# EAGLE board 11_16_22 Inverter PCB (EAGLE 7.7.0)
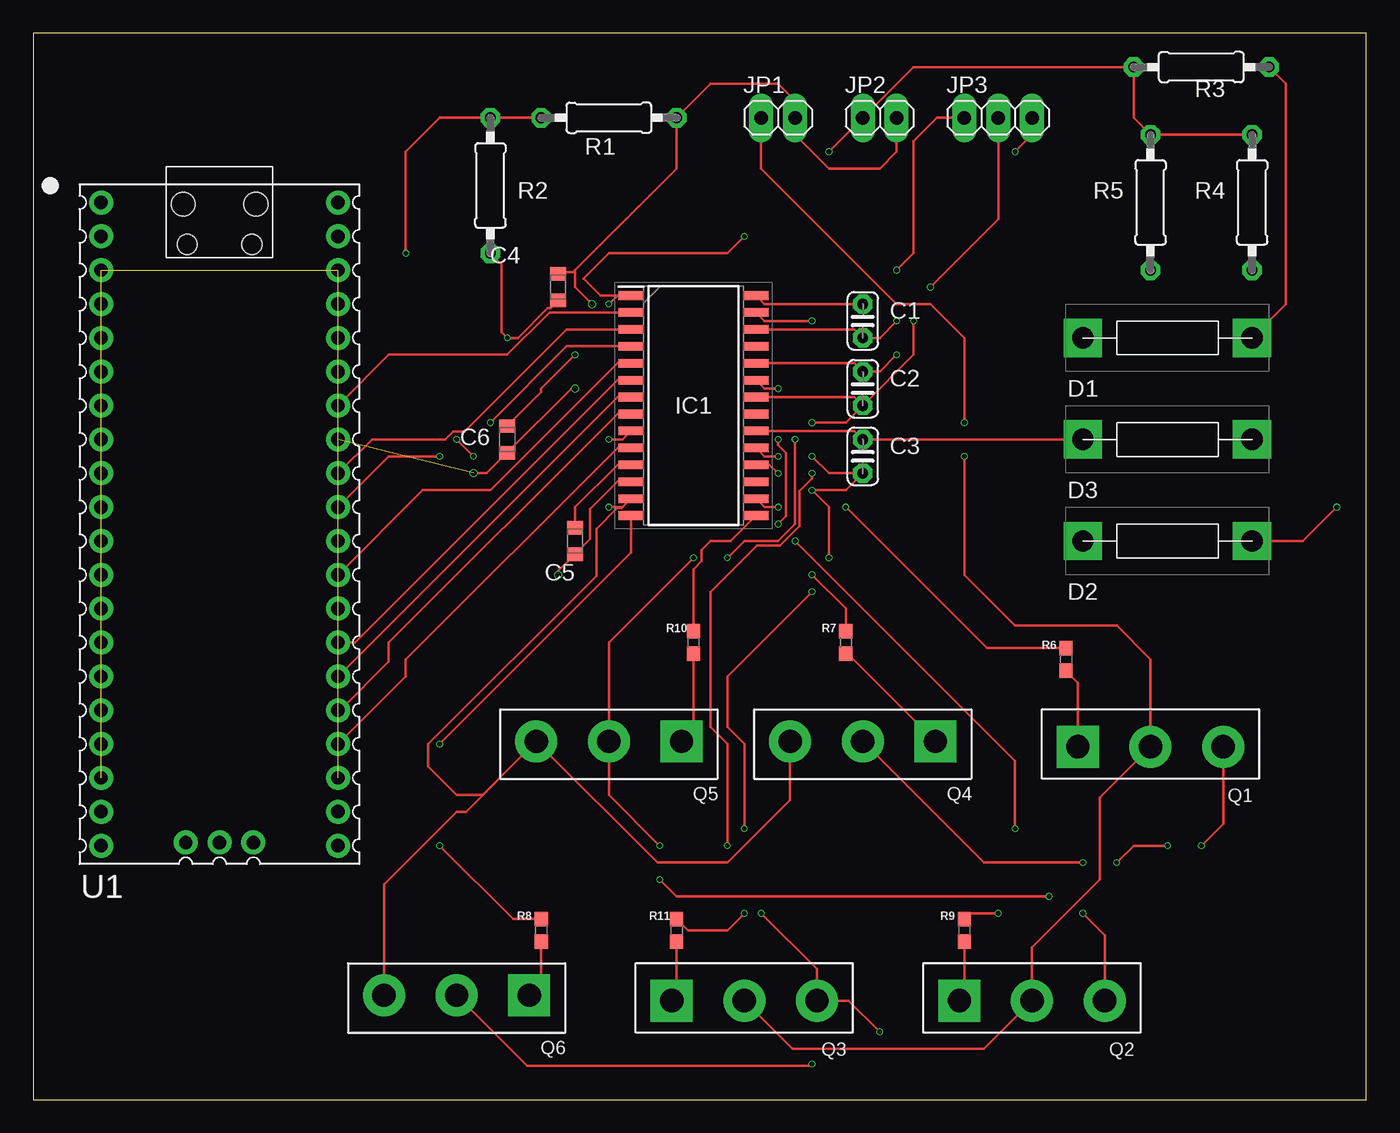
[diagram p0: board, top side]
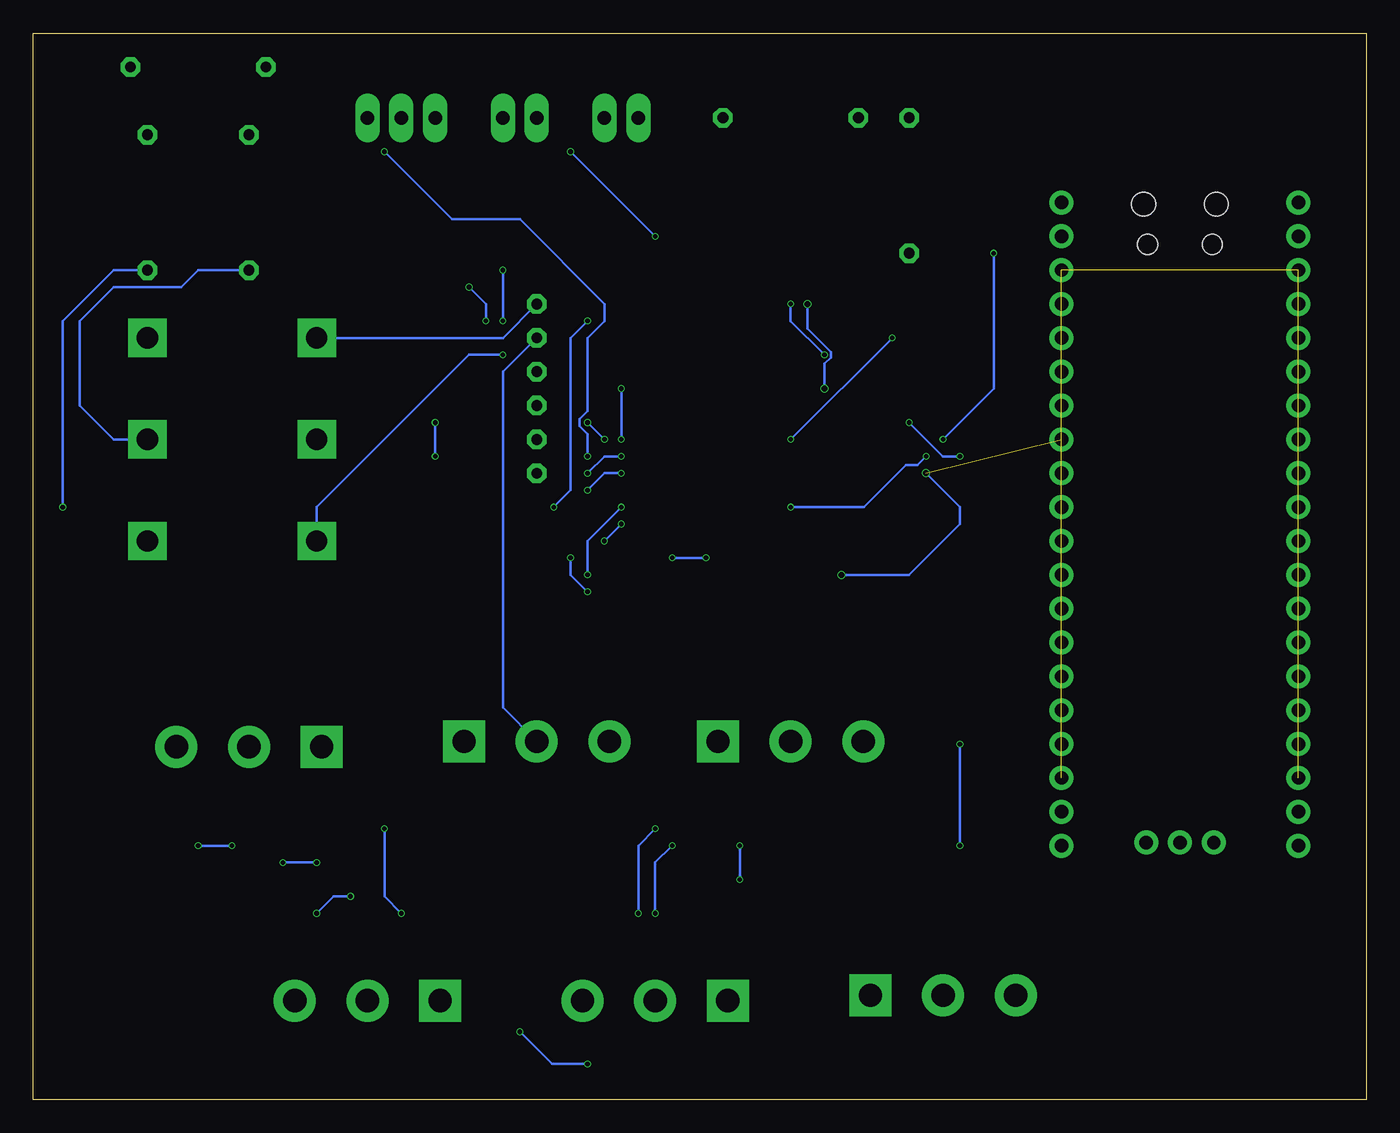
[diagram p1: board, bottom side, seen from below]

Size 100 x 80 mm. Coordinates in mm from the lower left corner, seen from the top.
Outline: 0,0 100,0 100,80 0,80 0,0
Copper layers (1*16): Top 0.035mm / dielectric 1.6mm / Bottom 0.035mm
Design rules "jlcpcb-2layers": minimum track width 5mil, minimum drill 0.3mm, track to track 5mil, track to pad 5mil, pad to pad 5mil, via to via 5mil, smd to smd 5mil, copper to edge 0.2mm, drill to drill 6mil, minimum pad ring 10mil, minimum via ring 3mil, stop-mask expansion 4mil, vias tented up to drill 0mil, thermal gap 10mil

## Footprints (pad centres in the part's own frame; a part is rotated, then mirrored left to right if it is on the bottom)
C025-024X044 = drill 0.813 octagon: 1 -1.27,0; 2 1.27,0
SMC_Z = smd 1 x 1.2: + -1,0; - 1,0
DIOAD2460W140L700D440 = drill 1.6 pad 2.4 square: 1 1.27,0; 2 13.97,0
SOIC127P1031X265-28N = smd 1.89 x 0.65: 1 -4.68,8.255; 2 -4.68,6.985; 3 -4.68,5.715; 4 -4.68,4.445; 5 -4.68,3.175; 6 -4.68,1.905; 7 -4.68,0.635; 8 -4.68,-0.635; 9 -4.68,-1.905; 10 -4.68,-3.175; 11 -4.68,-4.445; 12 -4.68,-5.715; 13 -4.68,-6.985; 14 -4.68,-8.255; 15 4.68,-8.255; 16 4.68,-6.985; 17 4.68,-5.715; 18 4.68,-4.445; 19 4.68,-3.175; 20 4.68,-1.905; 21 4.68,-0.635; 22 4.68,0.635; 23 4.68,1.905; 24 4.68,3.175; 25 4.68,4.445; 26 4.68,5.715; 27 4.68,6.985; 28 4.68,8.255
1X02 = drill 1.016 long: 1 -1.27,0; 2 1.27,0
1X03 = drill 1.016 long: 1 -2.54,0; 2 0,0; 3 2.54,0
ROHM_SCT3022ALGC11_0 = drill 1.75 pad 2.65 square: 1 -0.2,5.45 | drill 1.75 pad 2.65: 2 -0.2,0; 3 -0.2,-5.45
0207/10 = drill 0.813 octagon: 1 -5.08,0; 2 5.08,0
0603 = smd 1.1 x 1: 1 -0.85,0; 2 0.85,0
PICO-PKG-TH = drill 1: 1 -8.89,24.13; 2 -8.89,21.59; 3 -8.89,19.05; 4 -8.89,16.51; 5 -8.89,13.97; 6 -8.89,11.43; 7 -8.89,8.89; 8 -8.89,6.35; 9 -8.89,3.81; 10 -8.89,1.27; 11 -8.89,-1.27; 12 -8.89,-3.81; 13 -8.89,-6.35; 14 -8.89,-8.89; 15 -8.89,-11.43; 16 -8.89,-13.97; 17 -8.89,-16.51; 18 -8.89,-19.05; 19 -8.89,-21.59; 20 -8.89,-24.13; 21 8.89,-24.13; 22 8.89,-21.59; 23 8.89,-19.05; 24 8.89,-16.51; 25 8.89,-13.97; 26 8.89,-11.43; 27 8.89,-8.89; 28 8.89,-6.35; 29 8.89,-3.81; 30 8.89,-1.27; 31 8.89,1.27; 32 8.89,3.81; 33 8.89,6.35; 34 8.89,8.89; 35 8.89,11.43; 36 8.89,13.97; 37 8.89,16.51; 38 8.89,19.05; 39 8.89,21.59; 40 8.89,24.13; 41 -2.54,-23.9; 42 0,-23.9; 43 2.54,-23.9 | hole 1.8: -2.725,24; 2.725,24 | hole 1.5: -2.425,20.97; 2.425,20.97

## Placement (x,y rotation side)
C1  8n  [C025-024X044]  62.23,58.42 270 top
C2  8n  [C025-024X044]  62.23,53.34 270 top
C3  8n  [C025-024X044]  62.23,48.26 270 top
C4  10n  [SMC_Z]  39.37,60.96 90 top
C5  2n  [SMC_Z]  40.64,41.91 270 top
C6  80n  [SMC_Z]  35.56,49.53 270 top
D1  S3L20U-5000  [DIOAD2460W140L700D440]  77.47,57.15 0 top
D2  S3L20U-5000  [DIOAD2460W140L700D440]  77.47,41.91 0 top
D3  S3L20U-5000  [DIOAD2460W140L700D440]  77.47,49.53 0 top
IC1  FAN73895MX  [SOIC127P1031X265-28N]  49.53,52.07 0 top
JP1  [1X02]  55.88,73.66 0 top
JP2  [1X02]  63.5,73.66 0 top
JP3  [1X03]  72.39,73.66 0 top
Q1  ROHM_SCT3022ALGC11ROHM_SCT3022ALGC11_0_0  [ROHM_SCT3022ALGC11_0]  83.82,26.67 90 top
Q2  ROHM_SCT3022ALGC11ROHM_SCT3022ALGC11_0_0  [ROHM_SCT3022ALGC11_0]  74.93,7.62 90 top
Q3  ROHM_SCT3022ALGC11ROHM_SCT3022ALGC11_0_0  [ROHM_SCT3022ALGC11_0]  53.34,7.62 90 top
Q4  ROHM_SCT3022ALGC11ROHM_SCT3022ALGC11_0_0  [ROHM_SCT3022ALGC11_0]  62.23,26.67 270 top
Q5  ROHM_SCT3022ALGC11ROHM_SCT3022ALGC11_0_0  [ROHM_SCT3022ALGC11_0]  43.18,26.67 270 top
Q6  ROHM_SCT3022ALGC11ROHM_SCT3022ALGC11_0_0  [ROHM_SCT3022ALGC11_0]  31.75,7.62 270 top
R1  2M  [0207/10]  43.18,73.66 180 top
R2  1M  [0207/10]  34.29,68.58 270 top
R3  2.2  [0207/10]  87.63,77.47 0 top
R4  2.2  [0207/10]  91.44,67.31 270 top
R5  2.2  [0207/10]  83.82,67.31 270 top
R6  1k  [0603]  77.47,33.02 270 top
R7  1k  [0603]  60.96,34.29 270 top
R8  1k  [0603]  38.1,12.7 270 top
R9  1k  [0603]  69.85,12.7 270 top
R10  1k  [0603]  49.53,34.29 270 top
R11  1k  [0603]  48.26,12.7 270 top
U1  RASPBERRY_PICOTH  [PICO-PKG-TH]  13.97,43.18 0 top

## Library data of the parts
C1-C6 = rcl; SPICEPREFIX: C
D1-D3 = S3L20U-5000; DESCRIPTION: Diodes - General Purpose, Power, Switching Fast Recovery Diode; HEIGHT: mm; MANUFACTURER_NAME: Shindengen; MANUFACTURER_PART_NUMBER: S3L20U-5000; MOUSER_PART_NUMBER: 627-S3L20U-5000; MOUSER_PRICE-STOCK: https://www.mouser.com/Search/Refine.aspx?Keyword=627-S3L20U-5000
IC1 = FAN73895MX; DESCRIPTION: IC GATE DVR HALF BRDG 3PH 28SOIC; HEIGHT: 2.65mm; MANUFACTURER_NAME: onsemi; MANUFACTURER_PART_NUMBER: FAN73895MX; MOUSER_PART_NUMBER: 512-FAN73895MX; MOUSER_PRICE-STOCK: https://www.mouser.com/Search/Refine.aspx?Keyword=512-FAN73895MX
JP1-JP3 = pinhead
Q1-Q6 = ROHM - SCT3022ALGC11; CENTROID_NOT_SPECIFIED: No; CONTINUOUS_DRAIN_CURRENT: 93A; DATASHEET: https://www.rohm.com/datasheet/SCT3022AL/sct3022al-e; DEVICE_CLASS_L1: Discrete Semiconductors; DEVICE_CLASS_L2: Transistors; DEVICE_CLASS_L3: MOSFETs; DIGIKEY_DESCRIPTION: TRANS MOSFET NCH 650V 93A TO247N; DIGIKEY_PART_NUMBER: SCT3022ALGC11-ND; DRAIN_TO_SOURCE_BREAKDOWN_VOLTAGE: 650V; DRAIN_TO_SOURCE_RESISTANCE: 22mΩ; DRAIN_TO_SOURCE_VOLTAGE: 650V; FOOTPRINT_URL: https://d1d2qsbl8m0m72.cloudfront.net/en/techdata_basic/power/dimension/SiC_TO-247N-e.pdf; GATE_TO_SOURCE_VOLTAGE: 22V; HEIGHT: 25.5mm; INPUT_CAPACITACE_AT_VDS: 2208pF @ 500V; LEAD_FREE: yes; MAX_JUNCTION_TEMP: +175°C; MF: ROHM; MFG_PACKAGE_IDENT: SCT3022ALGC11; MFG_PACKAGE_IDENT_DATE: 2/2017; MFG_PACKAGE_IDENT_REV: 001; MOUSER_DESCRIPTION: SCT3022AL Series 650 V 93 A 28.6 mOhm N-Channel SiC Power Mosfet - TO-247N; MOUSER_PART_NUMBER: 755-SCT3022ALGC11; MPN: SCT3022ALGC11; NUMBER_OF_CHANNELS: 1; NUMBER_OF_N_CHANNELS: 1; PACKAGE: TO247; POWER_DISSIPATION: 339W; PREFIX: Q; ROHS: yes; STANDOFF_HEIGHT: 3.8mm; TECHNOLOGY: MOSFET; TEMPERATURE_RANGE_HIGH: +175°C; THRESHOLD_VGS: 2.7V; TURN_OFF_DELAY_TIME: 61ns; TURN_ON_DELAY_TIME: 25ns; VERIFICATION_VERSION: 0.0.0.1
R1-R5 = rcl; SPICEPREFIX: R
R6-R11 = SparkFun-Resistors
U1 = RpiPico

## Nets
3V3(OUT): U1.36
GND: C4.- C5.- C6.- IC1.12 JP1.2 JP2.2 R1.1 U1.3 U1.8 U1.13 U1.18 U1.23 U1.28 U1.33 U1.38
N$1: IC1.2 U1.34
N$2: IC1.13 Q4.3 Q5.3 Q6.3 R1.2 R2.1
N$3: IC1.19 R11.1
N$4: IC1.27 R6.1
N$5: IC1.8 U1.25
N$6: Q1.1 R6.2
N$7: IC1.16 R7.1
N$8: Q5.1 R10.2
N$9: IC1.14 R8.1
N$10: Q3.1 R11.2
N$11: Q2.1 R9.2
N$12: IC1.10 U1.24
N$13: IC1.23 R9.1
N$14: Q6.1 R8.2
N$15: IC1.15 R10.1
N$16: Q4.1 R7.2
N$17: C1.1 D1.1 IC1.28
N$18: C2.1 D2.1 IC1.24
N$19: C3.1 D3.1 IC1.20
N$20: IC1.3 U1.32
N$21: C5.+ IC1.11
N$22: IC1.4 U1.31
N$23: IC1.5 U1.29
N$24: IC1.6 U1.27
N$25: IC1.7 U1.26
N$26: D1.2 R3.2
N$27: C4.+ IC1.9 R2.2
N$28: D2.2 R4.2
N$29: D3.2 R5.2
SWGND: U1.42
V+: JP1.1 Q1.2 Q2.2 Q3.2
VBUS: U1.40
VDD: C6.+ IC1.1 JP2.1 R3.1 R4.1 R5.1
VOUT1: C1.2 IC1.26 JP3.1 Q1.3 Q4.2
VOUT2: C2.2 IC1.22 JP3.2 Q2.3 Q5.2
VOUT3: C3.2 IC1.18 JP3.3 Q3.3 Q6.2
VSYS: U1.39

## Tracks (layer width: path | path; a pad name or v marks a point on that pad's centre or on a via)
GND  (via drill 0.45)  (8 unrouted)
  Top 0.203: C5.- 41.78,42.05 41.78,44.31 43.82,46.35 IC1.12 | 35.83,48.53 C6.- | JP2.2 64.77,71.12 63.5,69.85 59.69,69.85 57.15,72.39 JP1.2 57.15,74.93 55.88,76.2 50.8,76.2 R1.1 48.26,69.85 40.64,62.23 | 39.1,62.23 39.24,62.09 | 39.24,62.09 C4.- | 39.24,62.09 40.51,62.09 40.64,62.23 | 40.64,40.64 C5.- | C6.- 34.02,46.99 v33.02,46.99 | v39.37,39.37 39.37,39.64 C5.- | C6.- 40.37,53.34 v40.64,53.34 | 40.64,62.23 40.64,60.96 v41.91,59.69
  Bottom 0.203: v33.02,46.99 30.48,44.45 30.48,43.18 34.29,39.37 v39.37,39.37 | v41.91,59.69 41.91,57.83 40.16,56.08 40.16,55.68 40.64,55.2 v40.64,53.34
N$1
  Top 0.203: U1.34 26.67,55.88 35.56,55.88 38.74,59.05 IC1.2
N$2  (via drill 0.35)
  Top 0.203: R1.2 R2.1 30.48,73.66 27.94,71.12 v27.94,63.5 | Q5.3 33.72,22.86 31.75,22.86 29.62,24.99 29.62,26.67 42.24,39.29 42.24,42.8 43.81,44.37 44.13,44.37 IC1.13 44.22,44.45 v43.18,44.45 | Q5.3 32.45,21.59 31.75,21.59 26.3,16.14 Q6.3 | Q5.3 46.82,17.78 52.07,17.78 56.78,22.49 Q4.3 | v33.02,48.26 v31.75,49.53
  Bottom 0.203: v33.02,48.26 33.68,47.6 34.54,47.6 37.69,44.45 v43.18,44.45 | v31.75,49.53 27.94,53.34 v27.94,63.5
N$3  (via drill 0.35)
  Top 0.203: IC1.19 54.85,48.26 v55.88,48.26 | v58.42,46.99 58.42,46.58 57.48,45.64 57.48,43.04 56.02,41.58 54.28,41.58 50.8,38.1 50.8,27.94 52.07,26.67 v52.07,19.05 | v53.34,13.97 52.07,12.7 49.11,12.7 R11.1
  Bottom 0.203: v55.88,48.26 57.15,48.26 v58.42,46.99 | v52.07,19.05 53.34,17.78 v53.34,13.97
N$4  (via drill 0.35)
  Top 0.203: IC1.27 54.85,58.42 v58.42,58.42 | R6.1 71.54,33.87 v60.96,44.45
  Bottom 0.203: v58.42,58.42 59.69,57.15 59.69,45.72 v60.96,44.45
N$5
  Top 0.203: U1.25 23.02,29.21 26.67,32.86 26.67,34.29 43.82,51.44 IC1.8
N$6
  Top 0.203: R6.2 78.37,31.27 Q1.1
N$7  (via drill 0.35)
  Top 0.203: IC1.16 54.85,44.45 v55.88,44.45 | v58.42,39.37 60.96,36.83 R7.1
  Bottom 0.203: v55.88,44.45 58.42,41.91 v58.42,39.37
N$8
  Top 0.203: R10.2 49.53,27.77 Q5.1
N$9  (via drill 0.35)
  Top 0.203: v30.48,19.05 35.98,13.55 R8.1 | IC1.14 44.85,41.04 v30.48,26.67
  Bottom 0.203: v30.48,26.67 v30.48,19.05
N$10
  Top 0.203: R11.2 48.26,7.79 Q3.1
N$11
  Top 0.203: R9.2 69.85,7.79 Q2.1
N$12
  Top 0.203: IC1.10 43.82,48.9 27.94,33.02 27.94,31.75 U1.24
N$13  (via drill 0.35)
  Top 0.203: IC1.23 54.85,53.34 v55.88,53.34 | v55.88,49.53 55.88,49.12 56.49,48.51 56.49,43.79 v55.88,43.18 | v57.16,41.9 73.66,25.4 v73.66,20.32 | R9.1 70.27,13.97 v72.39,13.97
  Bottom 0.203: v55.88,53.34 v55.88,49.53 | v55.88,43.18 v57.16,41.9 | v73.66,20.32 73.66,15.24 v72.39,13.97
N$14
  Top 0.203: R8.2 38.1,8.72 Q6.1
N$15
  Top 0.203: IC1.15 52.3,41.91 50.8,41.91 50.14,41.25 50.14,40.39 49.53,39.78 R10.1
N$16
  Top 0.203: Q4.1 61.11,33.44 R7.2
N$17
  Top 0.203: IC1.28 54.85,59.69 C1.1
  Bottom 0.203: D1.1 64.77,57.15 C1.1
N$18  (via drill 0.35)
  Top 0.203: IC1.24 61.6,55.24 C2.1 63.5,54.61 v64.77,55.88
  Bottom 0.203: v64.77,55.88 67.31,55.88 78.74,44.45 D2.1
N$19
  Top 0.203: IC1.20 61.6,50.16 C3.1 D3.1
N$20
  Top 0.203: IC1.3 40.01,57.78 32.36,50.14 31.5,50.14 30.89,49.53 25.4,49.53 U1.32
N$21
  Top 0.203: C5.+ 40.64,44.45 43.82,47.62 IC1.11
N$22  (via drill 0.35)
  Top 0.203: U1.31 26.67,48.26 v30.48,48.26 | IC1.4 40.01,56.52 v34.29,50.8
  Bottom 0.203: v30.48,48.26 31.75,48.26 v34.29,50.8
N$23
  Top 0.203: U1.29 29.21,45.72 34.29,45.72 43.82,55.24 IC1.5
N$24
  Top 0.203: IC1.6 43.82,53.98 24.13,34.29 U1.27
N$25
  Top 0.203: U1.26 43.82,52.7 IC1.7
N$26
  Top 0.203: R3.2 93.98,76.2 93.98,59.69 D1.2
N$27  (via drill 0.35)
  Top 0.203: R2.2 35.14,62.65 35.14,57.57 v35.56,57.15 36.36,57.15 38.6,59.38 38.8,59.38 C4.+ | v43.18,49.53 44.22,49.53 IC1.9
  Bottom 0.203: v35.56,57.15 v43.18,49.53
N$28  (via drill 0.35)
  Top 0.203: v97.79,44.45 95.25,41.91 D2.2
  Bottom 0.203: R4.2 93.98,62.23 97.79,58.42 v97.79,44.45
N$29
  Bottom 0.203: R5.2 87.63,62.23 88.9,60.96 93.98,60.96 96.52,58.42 96.52,52.07 93.98,49.53 D3.2
V+  (via drill 0.35)
  Top 0.203: Q3.2 56.95,3.81 71.32,3.81 Q2.2 74.93,11.43 80.01,16.51 80.01,22.66 Q1.2 83.82,33.02 81.28,35.56 73.66,35.56 69.85,39.37 v69.85,48.26 | JP1.1 54.61,69.85 64.77,59.69 67.31,59.69 69.85,57.15 v69.85,50.8
  Bottom 0.203: v69.85,50.8 v69.85,48.26
VDD  (via drill 0.35)
  Top 0.203: 43.82,60.33 42.55,60.33 41.28,61.59 43.18,63.5 52.07,63.5 v53.34,64.77 | IC1.1 44.45,60.33 43.82,60.33 | R4.1 R5.1 82.55,73.66 R3.1 66.04,77.47 JP2.1 v59.69,71.12 | C6.+ 38.1,53.07 38.1,53.34 v40.64,55.88 | v43.18,59.69 43.82,60.33
  Bottom 0.203: v43.18,59.69 43.18,58.42 v40.64,55.88 | v59.69,71.12 v53.34,64.77
VOUT1  (via drill 0.35)
  Top 0.203: IC1.26 61.6,57.78 C1.2 63.5,57.15 v64.77,58.42 | Q4.2 71.32,17.78 v78.74,17.78 | v64.77,62.23 66.04,63.5 66.04,71.92 67.78,73.66 JP3.1 | v81.28,17.78 82.55,19.05 v85.09,19.05 | v87.63,19.05 89.27,20.69 Q1.3
  Bottom 0.203: v64.77,62.23 v64.77,58.42 | v78.74,17.78 v81.28,17.78 | v85.09,19.05 v87.63,19.05 | Q4.2 64.77,29.41 64.77,54.61 C1.2
VOUT2  (via drill 0.35)
  Top 0.203: IC1.22 61.6,52.7 C2.2 | v52.07,40.64 53.34,41.91 55.88,41.91 57.15,43.18 v57.15,49.53 | C2.2 60.96,50.8 v58.42,50.8 | v76.2,15.24 48.26,15.24 v46.99,16.51 | v78.74,13.97 80.38,12.33 Q2.3 | JP3.2 72.39,66.04 v67.31,60.96 | v66.04,58.42 66.04,55.88 C2.2 | v46.99,19.05 43.18,22.86 Q5.2 43.18,34.29 v49.53,40.64
  Bottom 0.203: v49.53,40.64 v52.07,40.64 | v57.15,49.53 v58.42,50.8 | v76.2,15.24 77.47,15.24 v78.74,13.97 | v67.31,60.96 66.04,59.69 v66.04,58.42 | v46.99,16.51 v46.99,19.05
VOUT3  (via drill 0.35)
  Top 0.203: Q6.2 37.03,2.54 58.42,2.54 v58.42,2.66 | v63.5,5.08 61.16,7.42 Q3.3 58.79,9.79 v54.61,13.97 | IC1.18 55.25,47.62 v55.88,46.99 | v59.69,40.64 59.69,44.45 v58.42,45.72 60.96,45.72 C3.2 59.69,46.99 v58.42,48.26 | v58.42,38.1 52.07,31.75 52.07,27.94 53.34,26.67 v53.34,20.32 | JP3.3 74.93,72.39 v73.66,71.12
  Bottom 0.203: v58.42,2.66 61.08,2.66 v63.5,5.08 | v55.88,46.99 57.15,46.99 v58.42,45.72 | v59.69,40.64 59.69,39.37 v58.42,38.1 | v53.34,20.32 54.61,19.05 v54.61,13.97 | v58.42,48.26 58.42,49.94 59.03,50.55 59.03,51.05 58.42,51.66 58.42,57.15 57.15,58.42 57.15,59.69 63.5,66.04 68.58,66.04 v73.66,71.12